# Altium PCB PCB1.PcbDoc
Units mm, origin at the board's own origin, x right, y up, seen from the top; angles counter-clockwise.
Board outline 76.2 x 67.31 mm, 2 copper layers (Top Layer, Bottom Layer); 34 components, 24 nets, 139 pads, 56 vias.
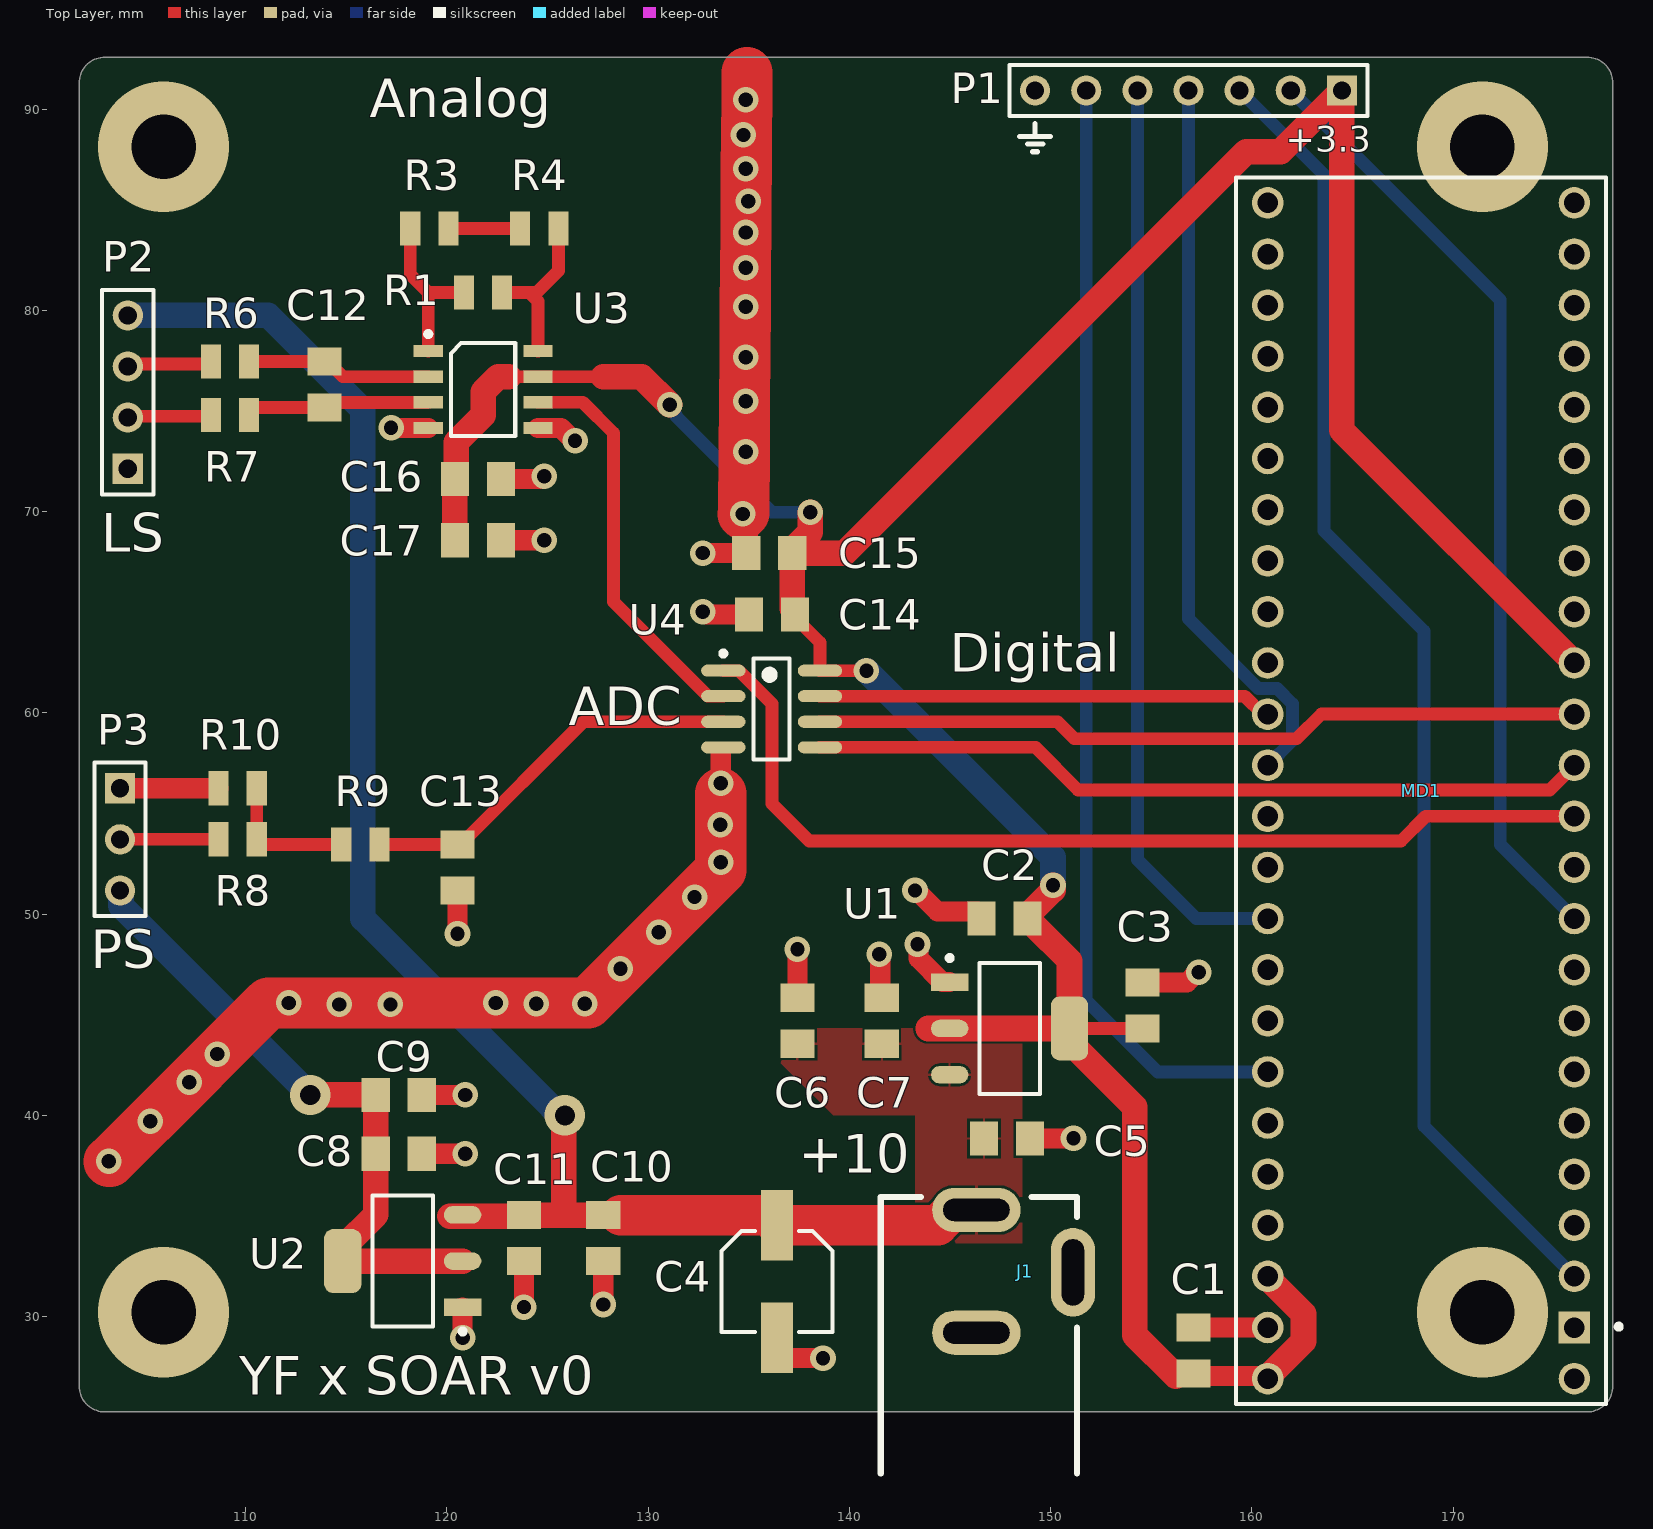
[diagram p0: Top Layer view]
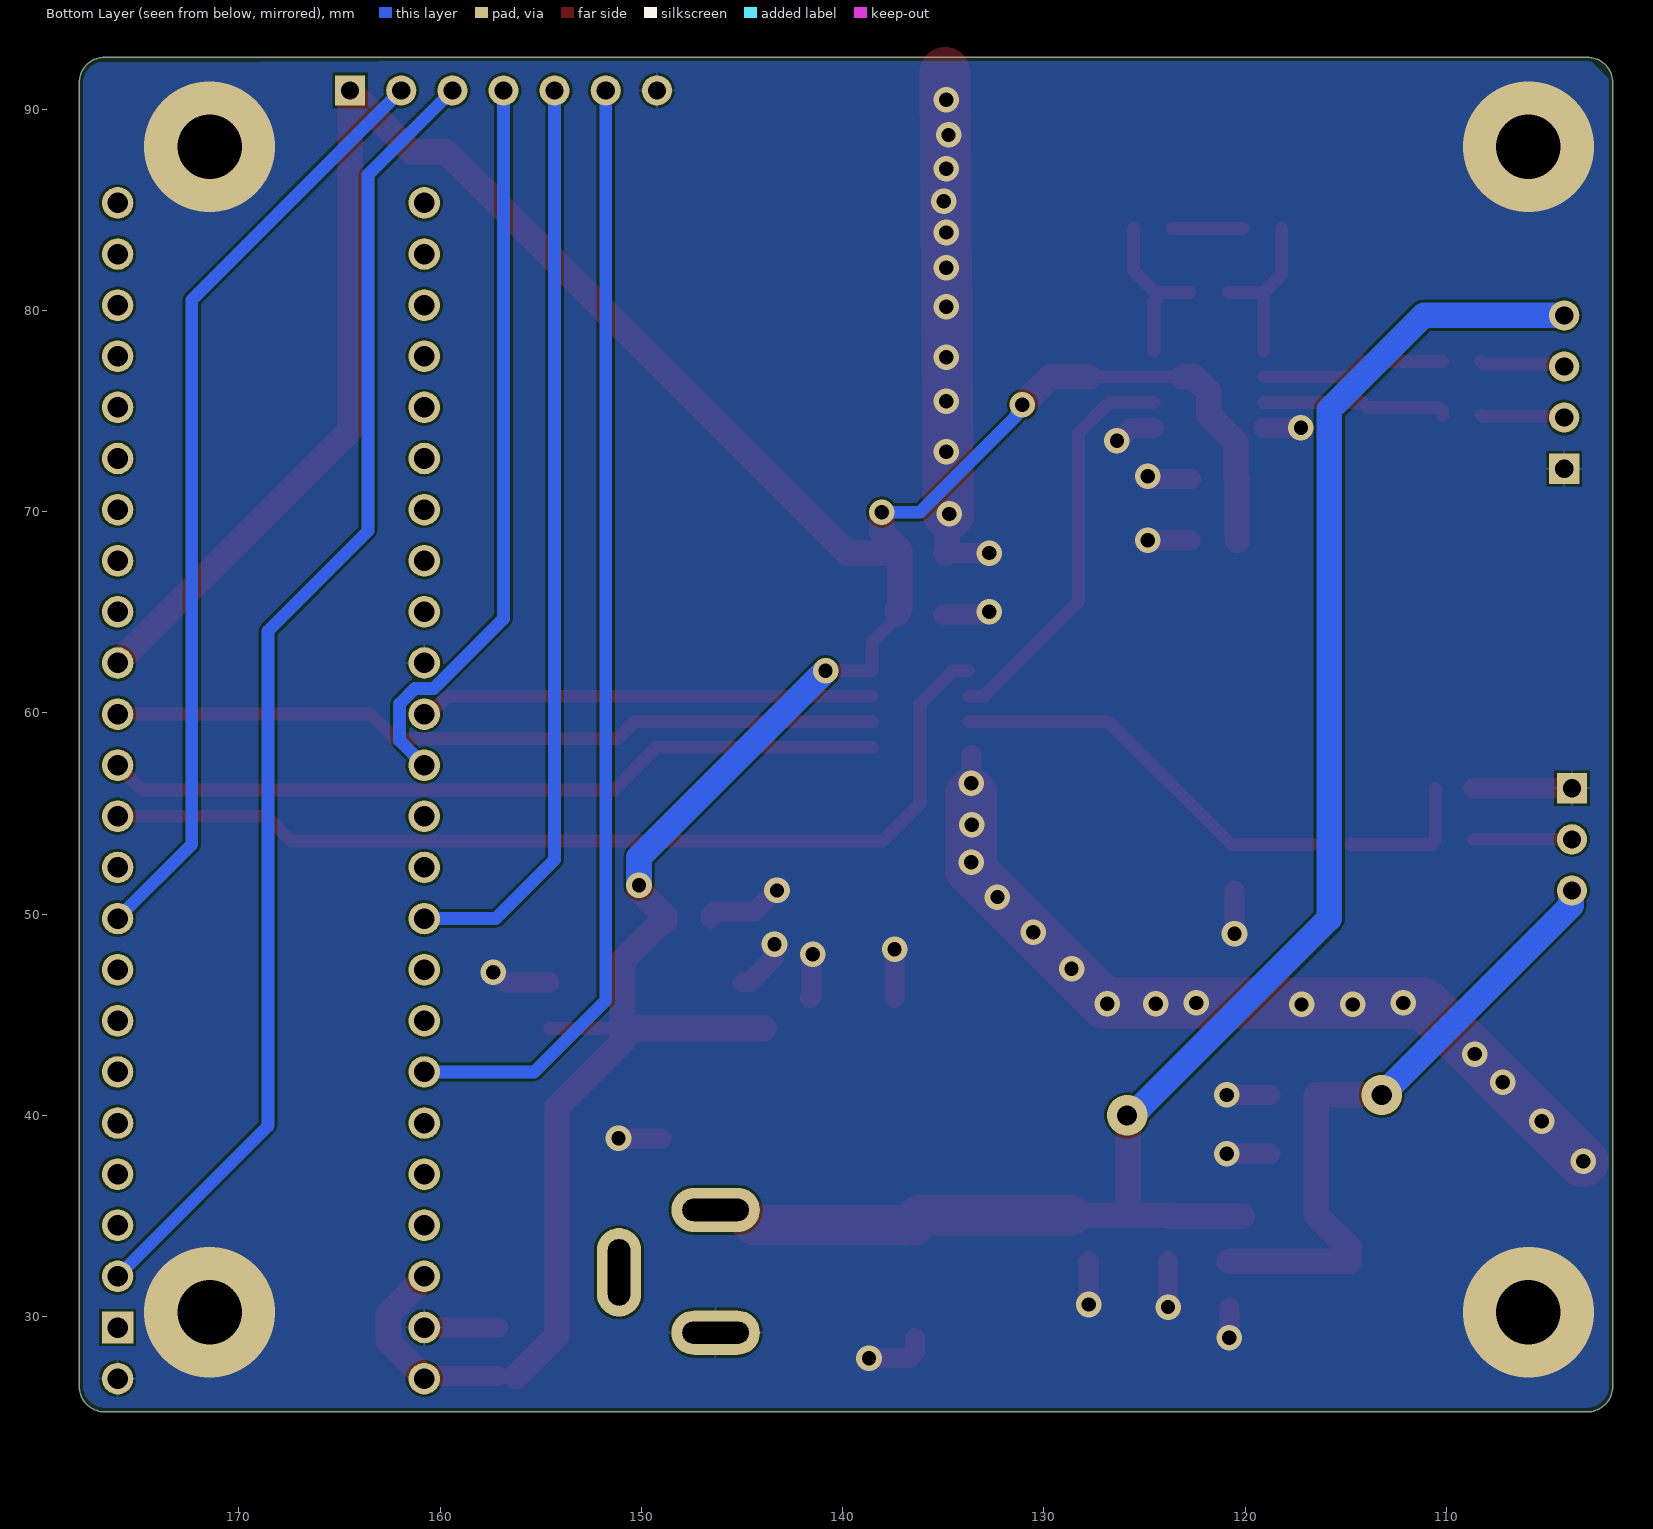
[diagram p1: Bottom Layer view, seen from below]
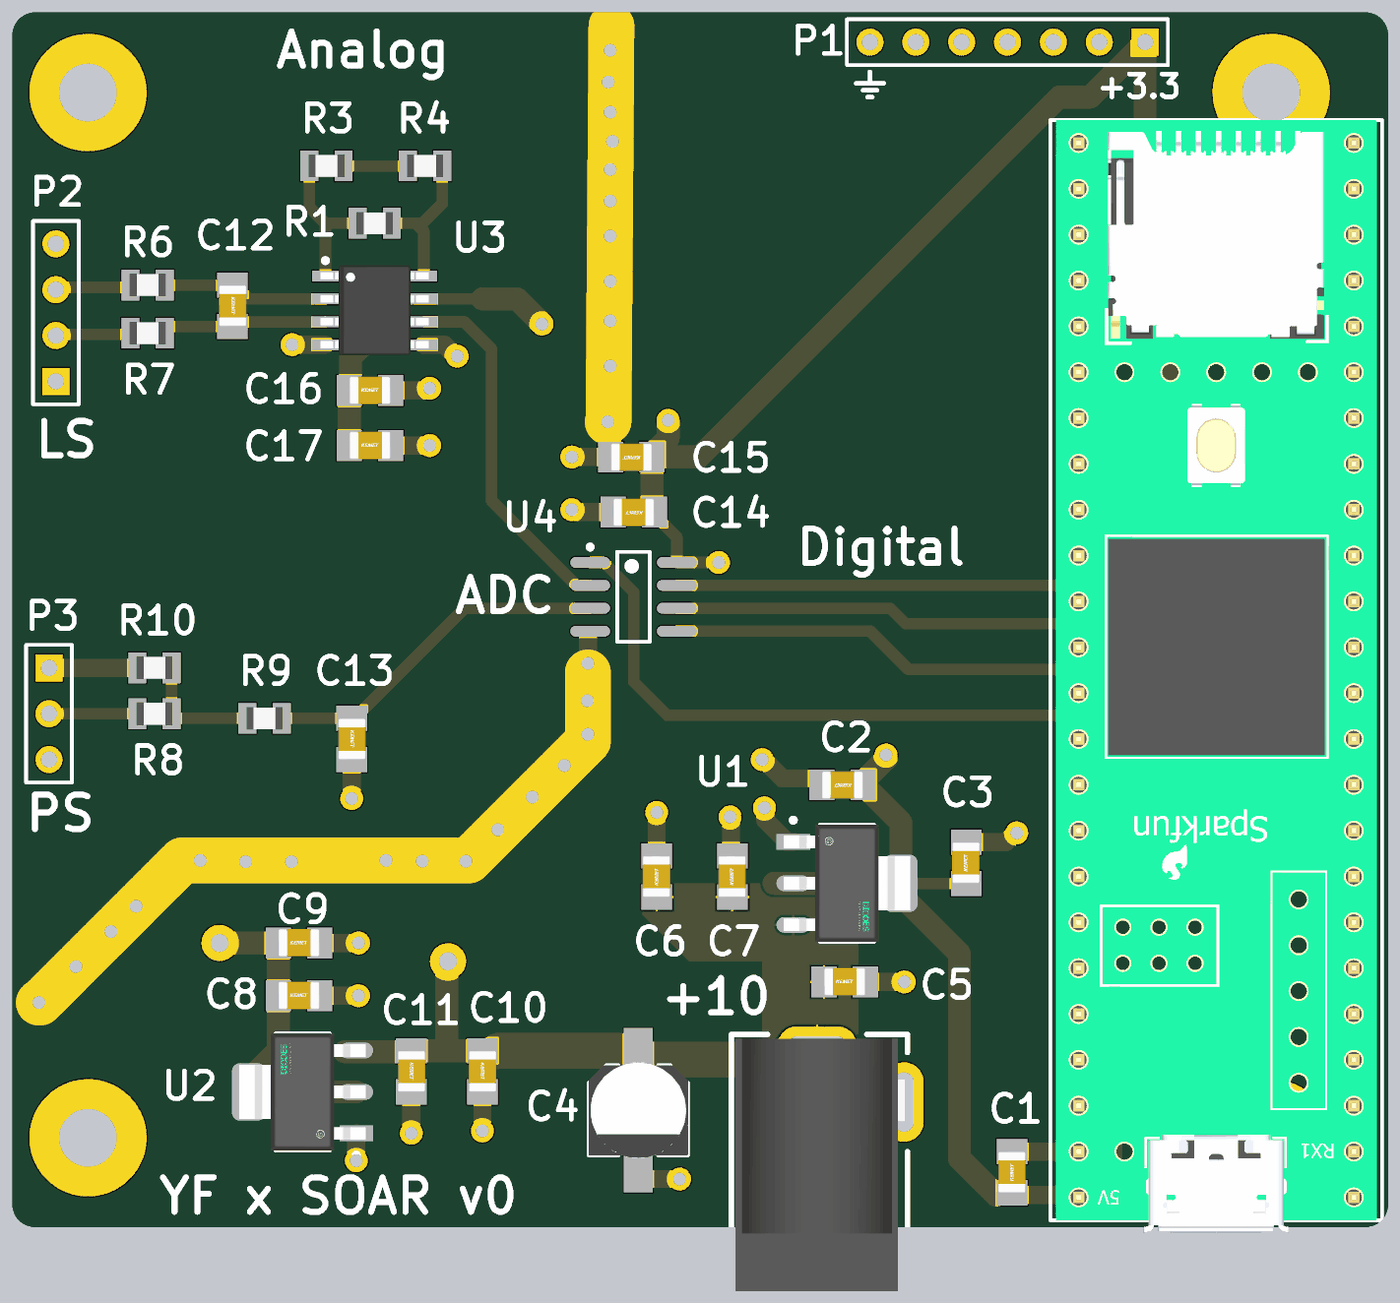
[diagram p2: 3D render of the assembled board from above, using the file's embedded part models]

## Layer stack, top to bottom
Top Solder: solder mask 0.0102, Solder Resist, Dk 3.5
Top Layer: signal copper 0.0356
Dielectric 1: dielectric 0.32, FR-4, Dk 4.8
Bottom Layer: signal copper 0.0356
Bottom Solder: solder mask 0.0102, Solder Resist, Dk 3.5

## Board outline
101.727,26.543 101.727,91.313 cw(c102.997,91.313) 102.997,92.583 176.657,92.583 cw(c176.657,91.313) 177.927,91.313 177.927,26.543 cw(c176.657,26.543) 176.657,25.273 102.997,25.273 cw(c102.997,26.543)

## Design rules (kind name [scope] priority, off if disabled: settings)
BoardOutlineClearance [All] p1: gap=0.2 ignorepadtopadclearanceinfootprint=FALSE
Clearance [All] p1: gap=0.127 ignorepadtopadclearanceinfootprint=FALSE except(0.25: Arc-Hole Track-Hole SMDPad-Hole THPad-Hole Via-Hole Fill-Hole Poly-Hole Region-Hole Text-Hole)
ComponentClearance [All] p1: gap=0.127 collisioncheckmode=3 verticalgap=0.127 showdistances=TRUE
DiffPairsRouting [All] p1: maxlimit=0.254 minlimit=0.127 mostfreqgap=0.127 toplayer_minwidth=0.127 toplayer_maxwidth=25.4 toplayer_prefwidth=0.127 bottomlayer_minwidth=0.127 bottomlayer_maxwidth=25.4 bottomlayer_prefwidth=0.127 maxuncoupledlength=12.7
Height [All] p1: minheight=0 maxheight=1816.048 prefheight=12.7
HoleSize [All] p1: absolutevalues=TRUE maxlimit=6.3 minlimit=0.3 maxpercent=80.000 minpercent=20.000
HoleToHoleClearance [All] p1: gap=0.25 allowstackedmicrovias=FALSE
MinimumAnnularRing [All] p1: minimumring=0.076
MinimumSolderMaskSliver [All] p1: minsoldermaskwidth=0
PlaneClearance [All] p1: clearance=0.127
PlaneConnect PlaneConnectPowerPads [InPadClass('PowerPads')] p1: planeconnectstyle=Direct reliefexpansion=0.508 reliefentries=4 reliefconductorwidth=0.254 reliefairgap=0.254
PlaneConnect [All] p2: pad.planeconnectstyle=Relief pad.reliefexpansion=0.3 pad.reliefentries=4 pad.reliefconductorwidth=0.127 pad.reliefairgap=0.127 via.planeconnectstyle=Direct via.reliefexpansion=0.3 via.reliefentries=4 via.reliefconductorwidth=0.127 via.reliefairgap=0.127
PolygonConnect PolygonConnectPowerPads [All vs (InPadClass('PowerPads'))] p1: connectstyle=Direct reliefconductorwidth=0.254 reliefentries=4 polygonreliefangle="90 Angle" airgapwidth=0.254
PolygonConnect [All] p2: thpad.connectstyle=Relief thpad.reliefconductorwidth=0.127 thpad.reliefentries=4 thpad.polygonreliefangle="90 Angle" thpad.airgapwidth=0.127 smdpad.connectstyle=Relief smdpad.reliefconductorwidth=0.127 smdpad.reliefentries=4 smdpad.polygonreliefangle="90 Angle" smdpad.airgapwidth=0.127 via.connectstyle=Direct via.reliefconductorwidth=0.127 via.reliefentries=4 via.polygonreliefangle="90 Angle" via.airgapwidth=0.127
RoutingVias [All] p1: holewidth=0.3 width=0.6 viastyle="Through Hole" minholewidth=0.3 minwidth=0.6 maxholewidth=0.6 maxwidth=6.6
SilkToSilkClearance [All] p1: silktosilkclearance=0
SilkToSolderMaskClearance [IsPad] p1: minsilkscreentomaskgap=0.127 clearancetoexposedcopper=TRUE
SolderMaskExpansion [All] p1: expansion=0.075 istentingtop=FALSE
Width [All] p1: maxlimit=25.4 minlimit=0.127 preferedwidth=0.127 minimp=50.000000 maximp=50.000000 favimp=50.000000
20 further rules are at their usual default settings.

## Components (designator, comment, footprint, x,y, rotation, side; value= is the part's Value field where it differs from the comment)
C1 ".1u" CAP_0805 157.099,28.321 r90 top
C2 ".1u" CAP_0805 147.701,49.784 r180 top
C3 "22u" CAP_0805 154.559,45.466 r90 top
C4 "100u" CAP-EL-NP-5MM 136.398,31.75 r270 top
C5 ".1u" CAP_0805 147.828,38.862 r0 top
C6 "10u" CAP_0805 137.414,44.704 r90 top
C7 ".1u" CAP_0805 141.605,44.704 r90 top
C8 ".1u" CAP_0805 117.602,38.1 r0 top
C9 "22u" CAP_0805 117.602,41.021 r0 top
C10 "10u" CAP_0805 127.762,33.909 r270 top
C11 ".1u" CAP_0805 123.825,33.909 r270 top
C12 ".1u" CAP_0805 113.919,76.327 r270 top
C13 ".1u" CAP_0805 120.523,52.324 r270 top
C14 ".1u" CAP_0805 136.144,64.897 r180 top
C15 "10u" CAP_0805 136.017,67.945 r180 top
C16 ".1u" CAP_0805 121.539,71.628 r0 top
C17 "10u" CAP_0805 121.539,68.58 r0 top
J1 "DCJ0202" DCJ0202 146.304,29.206 r0 top
MD1 "DEV-16996" FP-DEV-16996-MFG 168.402,56.134 r90 top
P1 "Header 7" HDR1X7 164.465,90.932 r180 top
P2 "Header 4" HDR1X4 104.14,72.136 r90 top
P3 "Header 3" HDR1X3 103.759,56.261 r270 top
R1 "DNP" RES_0805 121.793,80.899 r180 top
R3 "390" RES_0805 119.126,84.074 r180 top
R4 "220" RES_0805 124.587,84.074 r180 top
R6 "100k" RES_0805 109.22,77.47 r180 top
R7 "100k" RES_0805 109.22,74.803 r180 top
R8 "1.15k" RES_0805 109.601,53.721 r0 top
R9 "100k" RES_0805 115.697,53.467 r180 top
R10 "3.16k" RES_0805 109.601,56.261 r180 top
U1 "AZ1117IH-3.3TRG1" FP-SOT223-IPC_B 147.955,44.323 r0 top
U2 "AZ1117IH-5.0TRG1" FP-SOT223-IPC_B 117.801,32.766 r180 top
U3 "INA823" SOIC-8 121.793,76.073 r0 top
U4 "MCP3202T-CI/SN" SOIC-SN8_N 136.131,60.198 r0 top

## Footprints (in the part's own frame and the unit in brackets; to place one, negate y for a bottom-side part, rotate by r counter-clockwise, add the part's x,y. Pads: shape width x height; smd on the part's side, far side on the other; paste and mask are expansions set on the pad)
CAP-EL-NP-5MM [mm]
  rect 3.5x1.6 smd: 1(-2.8,0) 2(2.8,0)
  silkscreen extent -2.5,-2.75 2.5,2.75, body extent -2.65,-2.75 2.65,2.75, height 6.1
CAP_0805 [mm]
  rect 1.4x1.7 smd: 1(-1.143,0) 2(1.143,0)
  body extent -1.15,-0.76 1.15,0.79, height 1.01
DCJ0202 [mm]
  oval 4.4x2.2 hole 1.1 slot 3.3 at 0 deg: 1(0,6.1) 2(0,0)
  oval 2.2x4.4 hole 1.1 slot 3.3 at 90 deg: 3(4.8,3)
  silkscreen extent -4.75,-7 5,6.75, body extent -4.52,-7.48 4.84,6.52, height 11.01
FP-DEV-16996-MFG [mm]
  rect 1.57x1.57 hole 1.02 paste-1000 mask+0: 0(-26.67,-7.62)
  round 1.57 hole 1.02 paste-1000 mask+0: 1(-24.13,-7.62) 2(-21.59,-7.62) 3(-19.05,-7.62) 4(-16.51,-7.62) 5(-13.97,-7.62) 6(-11.43,-7.62) 7(-8.89,-7.62) 8(-6.35,-7.62) 9(-3.81,-7.62) 10(-1.27,-7.62) 11(1.27,-7.62) 12(3.81,-7.62) 13(3.81,7.62) 14(1.27,7.62) 15(-1.27,7.62) 16(-3.81,7.62) 17(-6.35,7.62) 18(-8.89,7.62) 19(-11.43,7.62) 20(-13.97,7.62) 21(-16.51,7.62) 22(-19.05,7.62) 23(-21.59,7.62) 24(8.89,-7.62) 25(11.43,-7.62) 26(13.97,-7.62) 27(16.51,-7.62) 28(19.05,-7.62) 29(21.59,-7.62) 30(24.13,-7.62) 31(26.67,-7.62) 32(29.21,-7.62) 33(29.21,7.62) 34(26.67,7.62) 35(24.13,7.62) 36(21.59,7.62) 37(19.05,7.62) 38(16.51,7.62) 39(13.97,7.62) 40(11.43,7.62) 41(8.89,7.62) 42(-29.21,7.62) 43(-26.67,7.62) 44(-24.13,7.62) 45(6.35,7.62) 46(-29.21,-7.62) 47(6.35,-7.62)
  silkscreen extent -30.48,-9.95 30.48,9.19, body extent -30.58,-9.29 30.58,9.29, height 0.25
FP-SOT223-IPC_B [mm]
  rect 1.86x0.872 smd paste+0 mask+0: 1(-2.976,2.3)
  rrect100% 1.86x0.872 smd paste+0 mask+0: 2(-2.976,0) 3(-2.976,-2.3)
  rrect47% 1.86x3.172 smd paste+0 mask+0: 4(2.976,0)
  silkscreen extent -3.1,-3.25 1.5,3.62, body extent -4.16,-3.5 4.16,3.5, height 0.25
HDR1X3 [mm] "Connector; Header; 3 Position"
  rect 1.5x1.5 hole 0.9: 1(0,0)
  round 1.5 hole 0.9: 2(2.54,0) 3(5.08,0)
  silkscreen extent -1.27,-1.27 6.35,1.27
HDR1X4 [mm] "Connector; Header; 4 Position"
  rect 1.5x1.5 hole 0.9: 1(0,0)
  round 1.5 hole 0.9: 2(2.54,0) 3(5.08,0) 4(7.62,0)
  silkscreen extent -1.27,-1.27 8.89,1.27
HDR1X7 [mm] "Connector; Header; 7 Position"
  rect 1.5x1.5 hole 0.9: 1(0,0)
  round 1.5 hole 0.9: 2(2.54,0) 3(5.08,0) 4(7.62,0) 5(10.16,0) 6(12.7,0) 7(15.24,0)
  silkscreen extent -1.27,-1.27 16.51,1.27
RES_0805 [mm]
  rect 1x1.7 smd: 1(-0.95,0) 2(0.95,0)
  body extent -1,-0.63 1,0.63, height 0.47
SOIC-8 [mm] "SOIC, 8-Leads, Body 4.91x3.90mm, Pitch 1.27mm, IPC Medium Density"
  rect 1.45x0.6 smd: 1(-2.725,1.905) 2(-2.725,0.635) 3(-2.725,-0.635) 4(-2.725,-1.905) 5(2.725,-1.905) 6(2.725,-0.635) 7(2.725,0.635) 8(2.725,1.905)
  silkscreen extent -2.85,-2.3 1.6,2.88, body extent -3,-2.5 3,2.5, height 1.75
SOIC-SN8_N [mm] "SOIC, 8-Leads, Body 4.9x3.9mm, Pitch 1.27mm, IPC Medium Density"
  oval 2.2x0.6 smd: 1(-2.4,1.905) 2(-2.4,0.635) 3(-2.4,-0.635) 4(-2.4,-1.905) 5(2.4,-1.905) 6(2.4,-0.635) 7(2.4,0.635) 8(2.4,1.905)
  silkscreen extent -2.52,-2.5 0.9,2.88, body extent -2,-2.5 2,2.5, height 1.75

## Part data
C1 C2 C3 C5 C6 C7 C8 C9 C10 C11 C12 C13 C14 C15 C16 C17: library part CAP_0805_16V, "Capacitor SMD 0805 16V"
C4: library part CAP_EL_NP_5MM, "Capacitor SMD Electrolytic Non-Polarised 5mm Diameter - 12V", Manufacturer=Nichicon
J1: "DC Barrell Jack 2.1mm 24V 5A THT", Manufacturer=CONEC, Manufacturer Part Number=DCJ0202
MD1: library part CMP-157412-000001-1, "TEENSY 4.1 (HEADERS)"
P1: "Header, 7-Pin", LatestRevisionDate=17-Jul-2002, LatestRevisionNote="Re-released for DXP Platform.", Publisher="Altium Limited"
P2: "Header, 4-Pin", LatestRevisionDate=17-Jul-2002, LatestRevisionNote="Re-released for DXP Platform.", Publisher="Altium Limited"
P3: "Header, 3-Pin", LatestRevisionDate=17-Jul-2002, LatestRevisionNote="Re-released for DXP Platform.", Publisher="Altium Limited"
R1 R3 R4 R6 R7 R8 R9 R10: library part RES_0805, "Resistor SMD 0805"
U1: library part CMP-12756-000043-1, "IC REG LINEAR 3.3V 1A SOT223", Case/Package=TO-261-4, Dropout Voltage=1.2V, Max Operating Temperature=125°C, Min Current Limit=1A, Min Operating Temperature=-40°C, Output Current=800mA, Output Voltage=3.3V, Mount="Surface Mount", Number of Pins=3, Number of Regulators=1, Packaging="Tape and Reel", RoHS Compliant=Yes
U2: library part CMP-12756-000043-1, "IC REG LINEAR 5.0V 1A SOT223", Case/Package=TO-261-4, Dropout Voltage=1.2V, Max Operating Temperature=125°C, Min Current Limit=1A, Min Operating Temperature=-40°C, Output Current=800mA, Output Voltage=3.3V, Mount="Surface Mount", Number of Pins=3, Number of Regulators=1, Packaging="Tape and Reel", RoHS Compliant=Yes
U4: library part CMP-0188-00478-2, "2.7V Dual Channel 12-Bit A/D Converter with SPI Serial Interface, 8-Pin SOIC 150mil, C Performance Grade, Industrial Temperature, Tape and Reel", Code_IPC=SOIC127P600-8, Code_JEDEC=MS-012, ComponentLink1Description="Manufacturer URL", ComponentLink1URL=http://www.microchip.com/, ComponentLink2Description=Datasheet, ComponentLink2URL=http://ww1.microchip.com/downloads/en/DeviceDoc/21034F.pdf, ComponentLink3Description="Package Specification", ComponentLink3URL=http://www.microchip.com/stellent/groups/techpub_sg/documents/packagingspec/en012702.pdf, DatasheetVersion="revF, Nov-2011", PackageDescription="8-Lead Plastic Small Outline (SN) - Narrow, 3.90mm Body [SOIC]", PackageReference=SOIC-SN8, PackageVersion="revBB, Aug-2009", RevisionNote="URLs added. DatasheetVersion updated."

## Via types
v1: diameter 1.27, hole 0.711, Top Layer to Bottom Layer, 50 vias
v2: diameter 6.5, hole 3.2, Top Layer to Bottom Layer, 4 vias
v3: diameter 2, hole 1, Top Layer to Bottom Layer, 2 vias

## Nets (pads, with @x,y where several pads share a name; then routed paths per layer and width w, separated by ;. In a path a pad name is that pad's centre, name@x,y a point inside that pad or via, vN(x,y) a via of type N, cw(c..) or ccw(c..) an arc to the next point about the centre after c; other vN are vias at no path point)
+3.3: C1.1 C2.1 C3.1 C14.1 C15.1 C16.1 C17.1 MD1.42 MD1.44 MD1.47 P1.1 U1.2 U1.4 U3.7 U4.8 | length 173
  Top Layer w0.635: 123.063,76.708 U3.7 127.762,76.708 ; C14.1 137.287,64.747 138.531,63.503 U4.8 v1(140.843,62.103) ; U1.4 C3.1 ; 156.21,27.051 C1.1@157.099,27.051 ; MD1.42@160.655,27.051 MD1.42
  Top Layer w1: C1.1@157.099,27.051 MD1.42@160.655,27.051
  Top Layer w1.27: C17.1 C16.1 120.461,71.693 120.461,73.458 121.793,74.79 121.793,75.964 122.537,76.708 123.063,76.708 ; 127.762,76.708 129.667,76.708 v1(131.064,75.311) ; C14.1 137.287,65.047 137.16,65.174 C15.1 ; v1(138.049,69.977) 138.049,68.984 137.16,68.095 C15.1 ; 143.911,44.323 U1.2 U1.4 ; v1(150.114,51.435) 150.114,51.204 148.844,49.934 C2.1 148.844,49.634 148.909,49.569 149.059,49.569 150.931,47.697 U1.4 ; 156.21,27.051 154.178,29.083 154.178,40.42 150.931,43.667 U1.4 ; MD1.42 160.782,27.005 162.56,28.783 162.56,30.145 160.782,31.923 MD1.44 ; MD1.47 164.465,74.041 P1.1 161.417,87.884 159.704,87.884 139.765,67.945 C15.1
  Bottom Layer w0.635: v1(131.064,75.311) 131.064,75.139 131.381,74.822 131.381,74.74 136.144,69.977 v1(138.049,69.977)
  Bottom Layer w1.27: v1(140.843,62.103) 150.114,52.832 v1(150.114,51.435)
+5: C8.1 C9.1 P3.3 U2.2 U2.4 | length 32.2
  Top Layer w1.27: v3(113.204,41.021) C9.1 C8.1 116.459,35.057 114.825,33.422 U2.4 U2.2
  Bottom Layer w1.27: P3.3 103.803,51.137 103.803,50.422 v3(113.204,41.021)
+10: C4.1 C5.1 C6.1 C7.1 C10.1 C11.1 J1.1 P2.4 U1.3 U2.3 | length 84.3
  Top Layer w1.27: U2.3@120.142,34.996 123.769,34.996 C11.1 125.793,35.052 ; v3(125.857,40.005) 125.793,39.941 125.793,35.052 ; 128.63,35.034 127.78,35.034 C10.1 125.793,35.052
  Top Layer w2: 128.63,35.034 128.636,35.04 136.198,35.04 136.398,34.84 C4.1 ; C4.1@136.906,34.55 144.394,34.55 145.15,35.306 J1.1
  Bottom Layer w1.27: P2.4 111.125,79.756 115.824,75.057 115.824,49.784 125.238,40.37 125.294,40.37 125.659,40.005 v3(125.857,40.005)
CS: MD1.10 U4.1 | length 49.2
  Top Layer w0.635: U4.1 134.496,62.103 136.144,60.455 136.144,55.49 137.999,53.635 167.406,53.635 168.636,54.864 MD1.10
D+: P2.2 R7.2 | length 4.2
  Top Layer w0.635: P2.2 104.203,74.739 108.206,74.739 R7.2
D-: P2.3 R6.2 | length 4.2
  Top Layer w0.635: P2.3 104.267,77.343 108.143,77.343 R6.2
GND: C1.2 C2.2 C3.2 C4.2 C5.2 C6.2 C7.2 C8.2 C9.2 C10.2 C11.2 C13.2 C14.2 C15.2 C16.2 C17.2 J1.2 MD1.43 MD1.45 MD1.46 P1.7 P2.1 P3.1 R10.2 U1.1 U2.1 U3.4 U3.5 U4.4 | length 120.1
  Top Layer w1: P3.1 R10.2 ; v1(117.221,74.168) U3.4 ; C8.2 v1(120.904,38.1) ; C9.2 v1(120.904,41.021) ; v1(120.523,49.022) C13.2 ; v1(120.777,28.956) U2.1 ; C17.2 v1(124.841,68.58) ; C16.2 124.641,71.628 124.768,71.755 v1(124.841,71.755) ; v1(123.825,30.48) C11.2 ; U3.5 125.657,74.168 126.292,73.533 v1(126.365,73.533) ; v1(127.762,30.607) C10.2 ; v1(132.715,65.024) 132.788,65.024 132.915,64.897 C14.2 ; v1(132.715,67.945) C15.2 ; v1(133.604,56.515) 133.604,57.912 ; C4.2 136.398,28.24 136.698,27.94 v1(138.684,27.94) ; C6.2 v1(137.414,48.26) ; v1(141.478,48.006) 141.53,47.954 141.53,45.922 C7.2 ; v1(143.256,51.181) 143.329,51.181 144.376,50.134 146.358,50.134 146.558,49.934 C2.2 ; v1(143.38,48.508) 143.432,48.457 143.432,47.804 144.613,46.623 U1.1 ; C5.2 v1(151.13,38.862) ; C3.2 156.772,46.609 157.281,47.118 v1(157.354,47.118) ; C1.2 MD1.43
  Top Layer w1.27: v1(134.704,69.891) 134.809,69.785 134.809,68.01 C15.2
  Top Layer w2.54: v1(103.197,37.719) 103.251,37.719 v1(107.188,41.656) v1(108.585,43.053) 111.125,45.593 v1(112.141,45.593) 117.189,45.593 v1(122.428,45.593) 127,45.593 133.604,52.197 v1(133.604,52.578) v1@133.604,56.007 ; v2@105.16,30.984 v2(105.918,30.226) ; v1(134.704,69.891) 134.747,69.934 134.747,69.977 134.769,72.984 134.788,75.491 134.804,77.683 134.823,80.19 134.837,82.128 134.85,83.872 134.861,85.43 134.873,87.047 134.886,88.719 134.899,90.476 134.909,91.82
  other v1: 105.256,39.71 114.649,45.518 117.189,45.518 124.433,45.552 126.846,45.552 128.619,47.296 130.529,49.108 132.302,50.852 133.577,54.442 134.847,72.984 134.842,75.49 134.847,77.683 134.842,80.189 134.847,82.128 134.842,83.872 134.974,85.43 134.842,87.047 134.732,88.72 134.842,90.476
  other v2: 171.45,30.226 105.918,88.138 171.45,88.138
IN+: C12.2 R7.1 U3.3 | length 9.3
  Top Layer w0.635: R7.1 110.17,75.001 110.353,75.184 C12.2 114.155,75.42 119.05,75.42 U3.3
IO_0: MD1.1 P1.3 | length 65.8
  Bottom Layer w0.635: P1.3 163.576,86.741 163.576,69.049 168.546,64.078 168.546,39.48 MD1.1
IO_1: MD1.8 P1.2 | length 47
  Bottom Layer w0.635: P1.2 172.339,80.518 172.339,53.467 MD1.8
IO_2: MD1.14 P1.4 | length 36.7
  Bottom Layer w0.635: P1.4 156.845,64.682 160.313,61.214 161.251,61.214 162.011,60.453 162.011,58.633 MD1.14
IO_3: MD1.17 P1.5 | length 45.9
  Bottom Layer w0.635: P1.5 154.305,52.705 157.226,49.784 MD1.17
IO_4: MD1.20 P1.6 | length 55.7
  Bottom Layer w0.635: P1.6 151.765,45.72 155.321,42.164 MD1.20
MISO: MD1.12 U4.6 | length 38.4
  Top Layer w0.635: U4.6 150.333,59.563 151.182,58.715 162.219,58.715 163.449,59.944 MD1.12
MOSI: MD1.11 U4.5 | length 38.9
  Top Layer w0.635: U4.5 149.243,58.293 151.362,56.175 174.793,56.175 MD1.11
NetC12_1: C12.1 R6.1 U3.2 | length 9.2
  Top Layer w0.635: R6.1 C12.1 114.069,77.47 114.831,76.708 U3.2
NetC13_1: C13.1 R9.1 U4.3 | length 19.6
  Top Layer w0.635: R9.1 C13.1 120.673,53.467 126.769,59.563 U4.3
NetP3_2: P3.2 R8.1 | length 4.9
  Top Layer w0.635: P3.2 R8.1
NetR1_1: R1.1 R4.1 U3.8 | length 9.8
  Top Layer w0.635: U3.8 124.518,80.46 124.269,80.709 124.079,80.899 122.926,80.899 R1.1 124.46,80.899 125.537,81.976 R4.1
NetR1_2: R1.2 R3.2 U3.1 | length 8.2
  Top Layer w0.635: R3.2 118.176,81.791 119.068,80.899 ; U3.1 119.068,80.899 ; R1.2 119.068,80.899
NetR3_1: R3.1 R4.2 | length 3.6
  Top Layer w0.635: R3.1 R4.2
NetR8_2: R8.2 R9.2 R10.1 | length 6.9
  Top Layer w0.635: R10.1 R8.2 110.551,53.65 110.734,53.467 R9.2
NetU3_6: U3.6 U4.2 | length 20.2
  Top Layer w0.635: U3.6 126.746,75.438 128.27,73.914 128.27,65.529 132.966,60.833 U4.2
SCK: MD1.13 U4.7 | length 22.6
  Top Layer w0.635: U4.7 159.64,60.833 160.529,59.944 MD1.13
pads on no net: J1.3 MD1.0 MD1.2 MD1.3 MD1.4 MD1.5 MD1.6 MD1.7 MD1.9 MD1.15 MD1.16 MD1.18 MD1.19 MD1.21 MD1.22 MD1.23 MD1.24 MD1.25 MD1.26 MD1.27 MD1.28 MD1.29 MD1.30 MD1.31 MD1.32 MD1.33 MD1.34 MD1.35 MD1.36 MD1.37 MD1.38 MD1.39 MD1.40 MD1.41

## Polygon pours and split planes (outlines as drawn)
+10 on Top Layer "+10_L01_P001" (solid, pour order 1): 136.525,44.323 136.525,42.672 139.192,40.005 143.256,40.005 143.256,34.925 144.526,33.655 148.59,33.655 148.59,43.815 148.082,44.323
GND on Bottom Layer "GND_L02_P000" (solid, pour order 0): 102.997,92.583 101.727,91.313 101.727,25.273 178.435,25.273 177.927,25.781 177.927,92.329

## Silkscreen, mask and mechanical layers (free items; w line width, h text height)
Top Overlay:
  lines w0.254: 148.463,88.646 149.225,88.646 ; 148.844,88.265 149.606,88.265 ; 149.098,87.884 149.352,87.884 ; 149.225,89.281 149.225,88.646 ; 149.987,88.646 149.225,88.646
  text "Analog" at 116.154,89.611 h1.91
  text "+3.3" at 161.671,87.884 h1.27
  text "LS" at 102.819,68.021 h1.91
  text "Digital" at 144.983,62.052 h1.91
  text "ADC" at 126.06,59.385 h1.91
  text "PS" at 102.311,47.32 h1.91
  text "+10" at 137.49,37.16 h1.91
  text "YF x SOAR v0" at 109.677,26.111 h1.91
Mechanical 13:
  the board outline again, w0.254